# Altium PCB 懒人关灯之_ZigBee终端电路.PcbDoc
Units mil, origin at the board's own origin, x right, y up, seen from the top; angles counter-clockwise.
Board outline 1215 x 1655 mil, 2 copper layers (Top Layer, Bottom Layer); 20 components, 14 nets, 68 pads, 0 vias.
Unrouted connection lines stored in the file: 39.
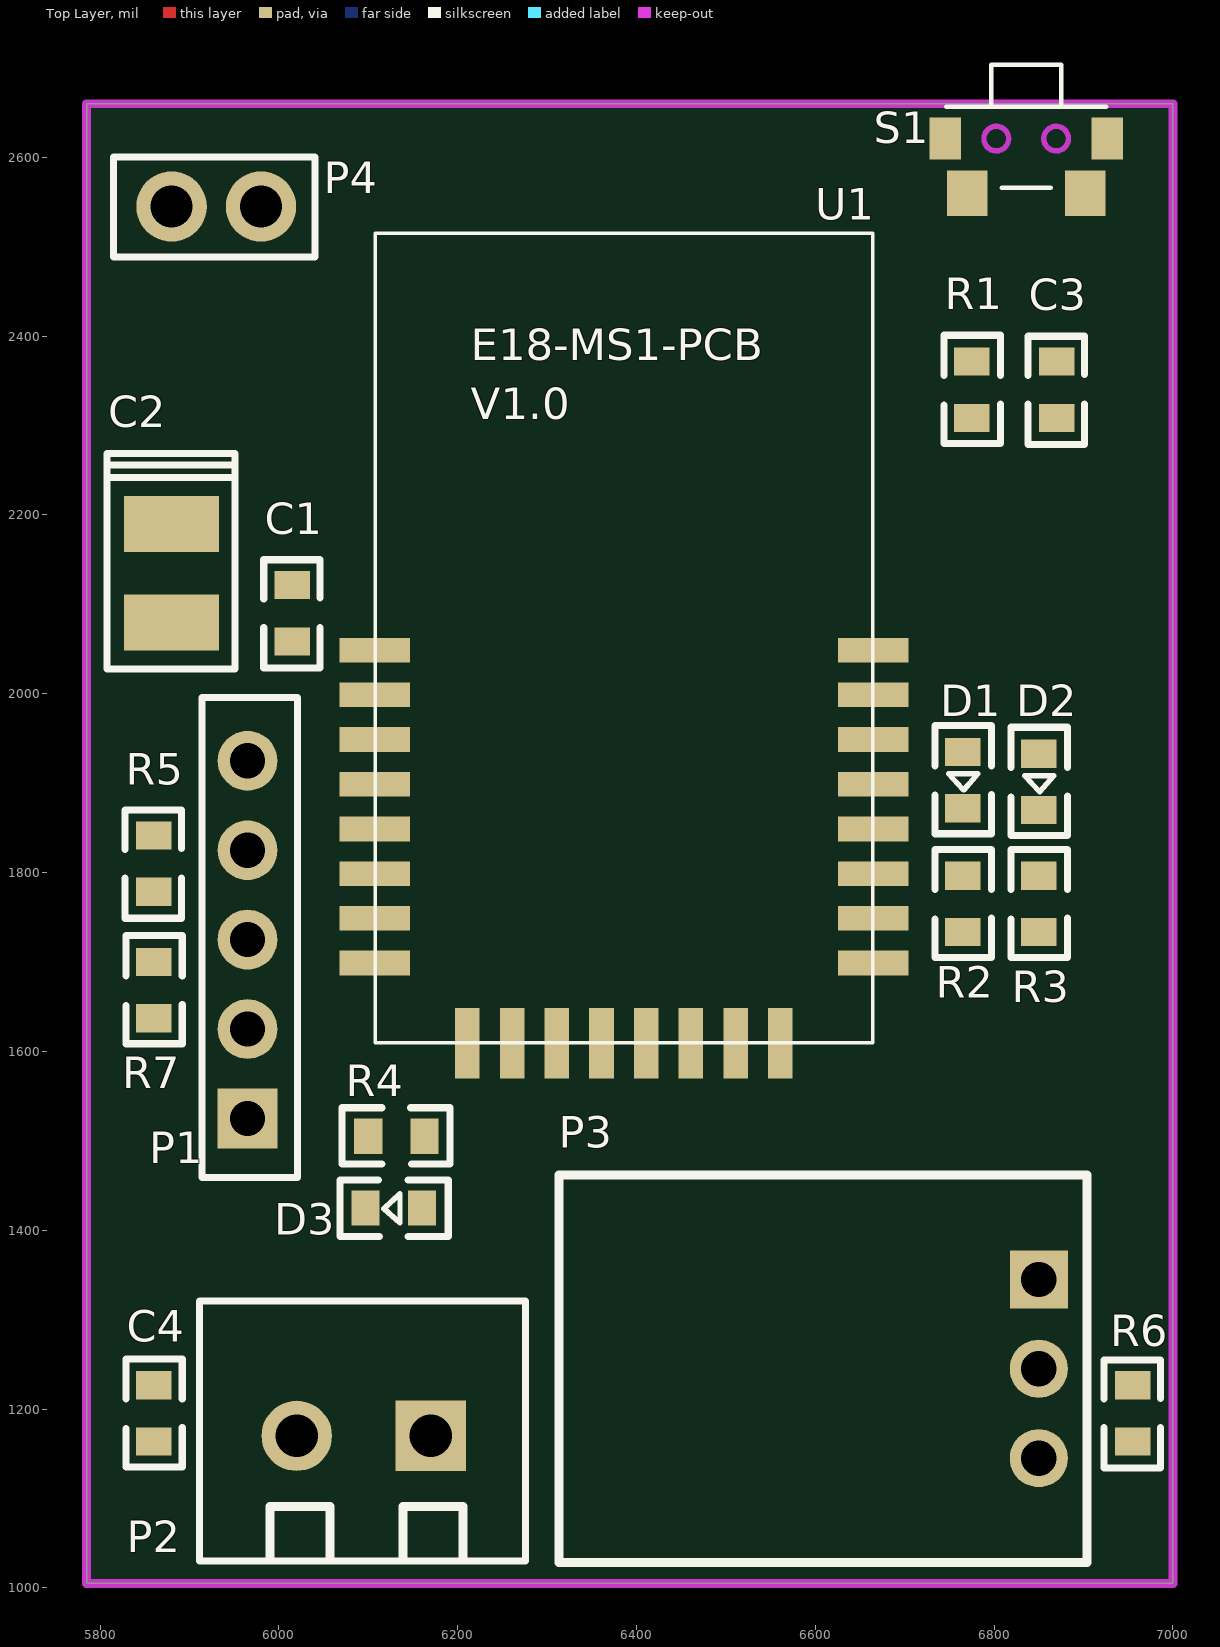
[diagram p0: Top Layer view]
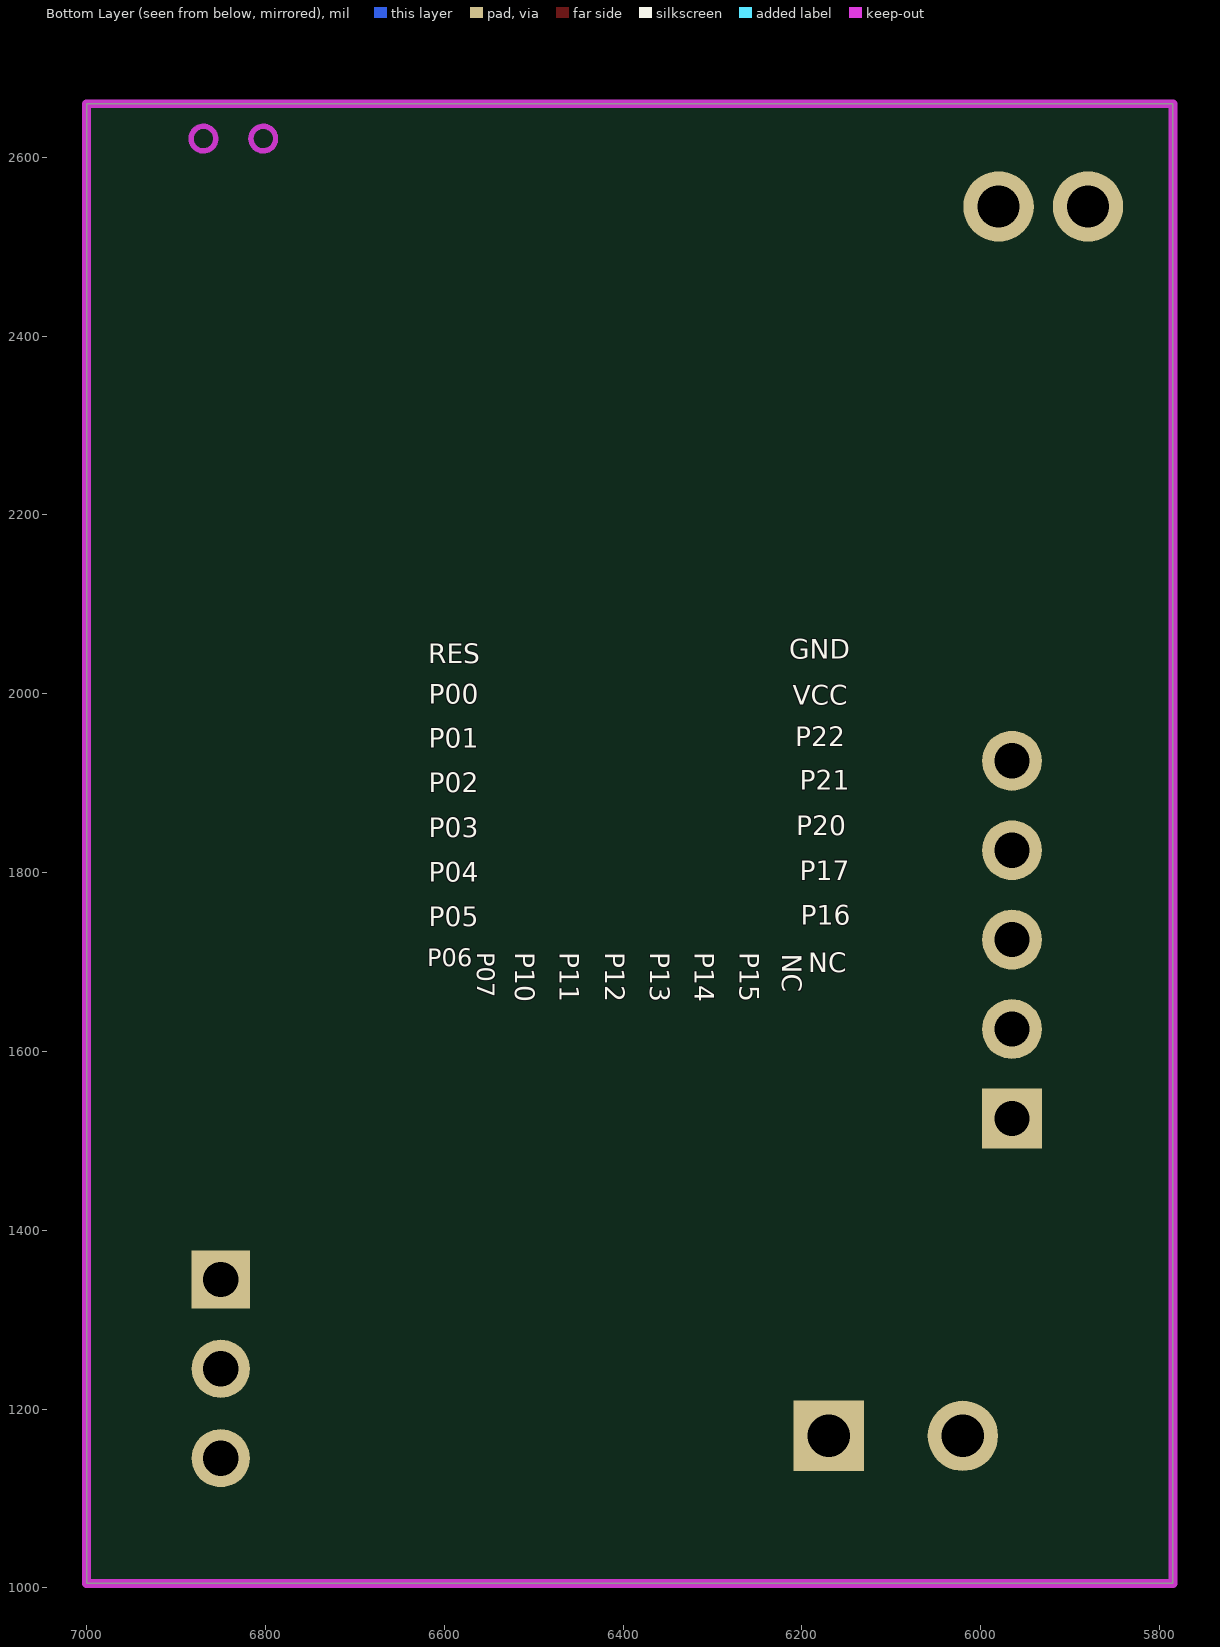
[diagram p1: Bottom Layer view, seen from below]

## Layer stack, top to bottom
Top Solder: solder mask 0.4, Solder Resist, Dk 3.5
Top Layer: signal copper 1.4
Dielectric1: dielectric 12.6, FR-4, Dk 4.8
Bottom Layer: signal copper 1.4
Bottom Solder: solder mask 0.4, Solder Resist, Dk 3.5

## Board outline
5785,1005 5785,2660 7000,2660 7000,1005

## Design rules (kind name [scope] priority, off if disabled: settings)
Clearance [All] p1: gap=10
PolygonConnect [All] p1: connectstyle=Relief reliefconductorwidth=10 reliefentries=4 polygonreliefangle="90 Angle" airgapwidth=10
RoutingVias [All] p1: holewidth=28 width=50 viastyle="Through Hole" minholewidth=28 minwidth=50 maxholewidth=28 maxwidth=50
SilkToSolderMaskClearance SilkscreenOverComponentPads [IsPad] p1: minsilkscreentomaskgap=10 clearancetoexposedcopper=TRUE
SolderMaskExpansion [All] p1: expansion=4
Width [All] p1: maxlimit=10 minlimit=10 preferedwidth=10
29 further rules are at their usual default settings.

## Components (designator, comment, footprint, x,y, rotation, side; value= is the part's Value field where it differs from the comment)
C1 "Cap" 0603 6015,2090 r90 top
C2 "Cap Pol1" CT2335-1210 5808,2268.88 r270 top
C3 "Cap" 0603 6870,2340 r90 top
C4 "Cap" 0603 5860,1195 r270 top
D1 "Green" 0603-led 6734,1964.5 r270 top
D2 "Red" 0603-led 6819,1962.5 r270 top
D3 "Red" 0603-led 6189.5,1456 r180 top
P1 "下载口" "5-PIN - zhen" 5965,1525 r90 top
P2 "按键" "2-pin - duanzi - 3.81" 6170,1170 r180 top
P3 "TOUCH" 3PIN-TOUCH 6904,1461.54 r270 top
P4 "GPIO" 2-pin 6070,2710 r180 top
R1 "Res1" 0603 6775,2340 r270 top
R2 "Res1" 0603 6765,1765 r270 top
R3 "Res1" 0603 6850,1765 r270 top
R4 "Res1" 0603 6131.5,1505 r0 top
R5 "Res1" 0603 5860,1810 r90 top
R6 "Res1" 0603 6955,1195 r90 top
R7 "Res1" 0603 5860,1668.5 r270 top
S1 "U1-RST" K2-1806SA 6796.57,2703.7 r0 top
U1 "CC2530" ZIGBEE-E18-MS1-PCB 6320,1930 r90 top

## Footprints (in the part's own frame and the unit in brackets; to place one, negate y for a bottom-side part, rotate by r counter-clockwise, add the part's x,y. Pads: shape width x height; smd on the part's side, far side on the other; paste and mask are expansions set on the pad)
2-pin [mm]
  round 2 hole 1.2: 1(2.286,4.191) 2(4.826,4.191)
  silkscreen extent 0.76,2.78 6.48,5.62
"2-pin - duanzi - 3.81" [mm]
  rect 2x2 hole 1.2: 1(0,0)
  round 2 hole 1.2: 2(3.81,0)
  silkscreen extent -2.69,-3.84 6.58,3.56
3PIN-TOUCH [mm]
  rect 1.65x1.65 hole 1: 1(2.96,-1.372)
  round 1.65 hole 1: 2(5.5,-1.372) 3(8.04,-1.372)
  silkscreen extent 0,-15 11,0
"5-PIN - zhen" [mm]
  rect 1.7x1.7 hole 1: 1(0,0)
  round 1.7 hole 1: 2(2.54,0) 3(5.08,0) 4(7.62,0) 5(10.16,0)
  silkscreen extent -1.68,-1.42 11.96,1.3
0603 [mm]
  rect 0.8x1 smd: 1(-0.8,0) 2(0.8,0)
  silkscreen extent -1.55,-0.79 1.52,0.81, body extent -0.8,-0.37 0.8,0.43, height 0.45
0603-led [mm]
  rect 0.8x1 smd: 1(0.749,0.787) 2(2.349,0.787)
  silkscreen extent 0,0 3.07,1.6
CT2335-1210 [mm]
  rect 1.6x2.7 smd: 1(2.004,1.829) 2(4.804,1.829)
  silkscreen extent 0,0 6.12,3.63
K2-1806SA [mm]
  rect 1.15x1.3 smd: 1(-0.675,-3.65) 2(2.675,-3.65)
  rect 0.9x1.2 smd: ""(-1.3,-2.1) ""(3.3,-2.1)
  Keep-Out Layer circle w0.152: c1.85,-2.1 r0.35
  Keep-Out Layer circle w0.152: c0.15,-2.1 r0.35
  silkscreen extent -1.27,-3.5 3.27,0
ZIGBEE-E18-MS1-PCB [mm]
  rect 0.7x2 smd: 1(3.018,5.409) 2(1.748,5.409) 3(0.478,5.409) 4(-0.792,5.409) 5(-2.062,5.409) 6(-3.332,5.409) 7(-4.602,5.409) 8(-5.872,5.409) 17(-5.872,-8.756) 18(-4.602,-8.756) 19(-3.332,-8.756) 20(-2.062,-8.756) 21(-0.792,-8.756) 22(0.478,-8.756) 23(1.748,-8.756) 24(3.018,-8.756)
  rect 2x0.7 smd: 9(-8.153,2.771) 10(-8.153,1.501) 11(-8.153,0.231) 12(-8.153,-1.039) 13(-8.153,-2.309) 14(-8.153,-3.579) 15(-8.153,-4.849) 16(-8.153,-6.119)
  silkscreen extent -8.14,-8.74 14.86,5.4

## Part data
C1 C3 C4: "Capacitor"
C2: "Polarized Capacitor (Radial)"
D1 D2 D3: library part LED0, "Typical INFRARED GaAs LED"
P1: library part "Header 5", "Header, 5-Pin"
P2 P4: library part 2PIN
R1 R2 R3 R4 R5 R6 R7: "Resistor"
S1: library part SW-PB, "Switch"

## Nets (pads, with @x,y where several pads share a name; then routed paths per layer and width w, separated by ;. In a path a pad name is that pad's centre, name@x,y a point inside that pad or via, vN(x,y) a via of type N, cw(c..) or ccw(c..) an arc to the next point about the centre after c; other vN are vias at no path point)
GND: C1.1 C2.2 C3.2 C4.2 P1.2 P2.2 P3.1 P4.2 R2.2 R3.2 R7.2 S1.2 U1.1
NetD1_1: D1.1 U1.22
NetD1_2: D1.2 R2.1
NetD2_1: D2.1 U1.23
NetD2_2: D2.2 R3.1
NetD3_2: D3.2 R4.1
NetR4_2: R4.2 U1.10
P0_2: P4.1 U1.21
P0_6: P3.2 R6.2 U1.17
P0_7: C4.1 P2.1 U1.16
P2_1/DD: P1.3 R5.2 R7.1 U1.4
P2_2/DC: P1.4 U1.3
RESET_N: C3.1 P1.5 R1.2 S1.1 U1.24
VCC-3.3: C1.2 C2.1 D3.1 P1.1 P3.3 R1.1 R5.1 R6.1 U1.2
pads on no net: S1. U1.5 U1.6 U1.7 U1.8 U1.9 U1.11 U1.12 U1.13 U1.14 U1.15 U1.18 U1.19 U1.20

## Keep-outs
Keep-Out Layer:
  the board outline again, w10

## Text inside footprints (layer, text, board x,y; h text height)
U1: Top Overlay "V1.0" at 6214.62,2307.15 h35.43; Top Overlay "E18-MS1-PCB" at 6214.62,2372.9 h35.43; Bottom Overlay "GND" at 6214.38,2039.22 h21.65; Bottom Overlay "VCC" at 6210.18,1987.57 h21.65; Bottom Overlay "P22" at 6207.3,1941.13 h21.65; Bottom Overlay "P21" at 6202.54,1892.47 h21.65; Bottom Overlay "P20" at 6206.12,1841.82 h21.65; Bottom Overlay "P17" at 6202.66,1791.16 h21.65; Bottom Overlay "P16" at 6201.48,1741.51 h21.65; Bottom Overlay "NC" at 6193.09,1688.64 h21.65; Bottom Overlay "P06" at 6619.11,1695.01 h19.68; Bottom Overlay "P05" at 6617.54,1739.98 h21.65; Bottom Overlay "P04" at 6617.54,1789.63 h21.65; Bottom Overlay "P03" at 6617.54,1839.29 h21.65; Bottom Overlay "P02" at 6617.54,1889.94 h21.65; Bottom Overlay "P01" at 6617.54,1939.6 h21.65; Bottom Overlay "P00" at 6617.54,1989.04 h21.65; Bottom Overlay "RES" at 6617.85,2034.41 h21.65; Bottom Overlay "NC" at 6221.9,1709.46 h21.65 r90; Bottom Overlay "P15" at 6269.72,1711.04 h21.65 r90; Bottom Overlay "P14" at 6319.72,1711.04 h21.65 r90; Bottom Overlay "P13" at 6369.72,1711.04 h21.65 r90; Bottom Overlay "P12" at 6419.72,1711.04 h21.65 r90; Bottom Overlay "P11" at 6470.72,1711.04 h21.65 r90; Bottom Overlay "P10" at 6520.72,1711.04 h21.65 r90; Bottom Overlay "P07" at 6563.24,1711.04 h19.68 r90